# Altium PCB PCB1.PcbDoc
Units mil, origin at the board's own origin, x right, y up, seen from the top; angles counter-clockwise.
Board outline 4400 x 10000 mil, 2 copper layers (Top Layer, Bottom Layer); 340 components, 72 nets, 819 pads, 0 vias.
Unrouted connection lines stored in the file: 1.
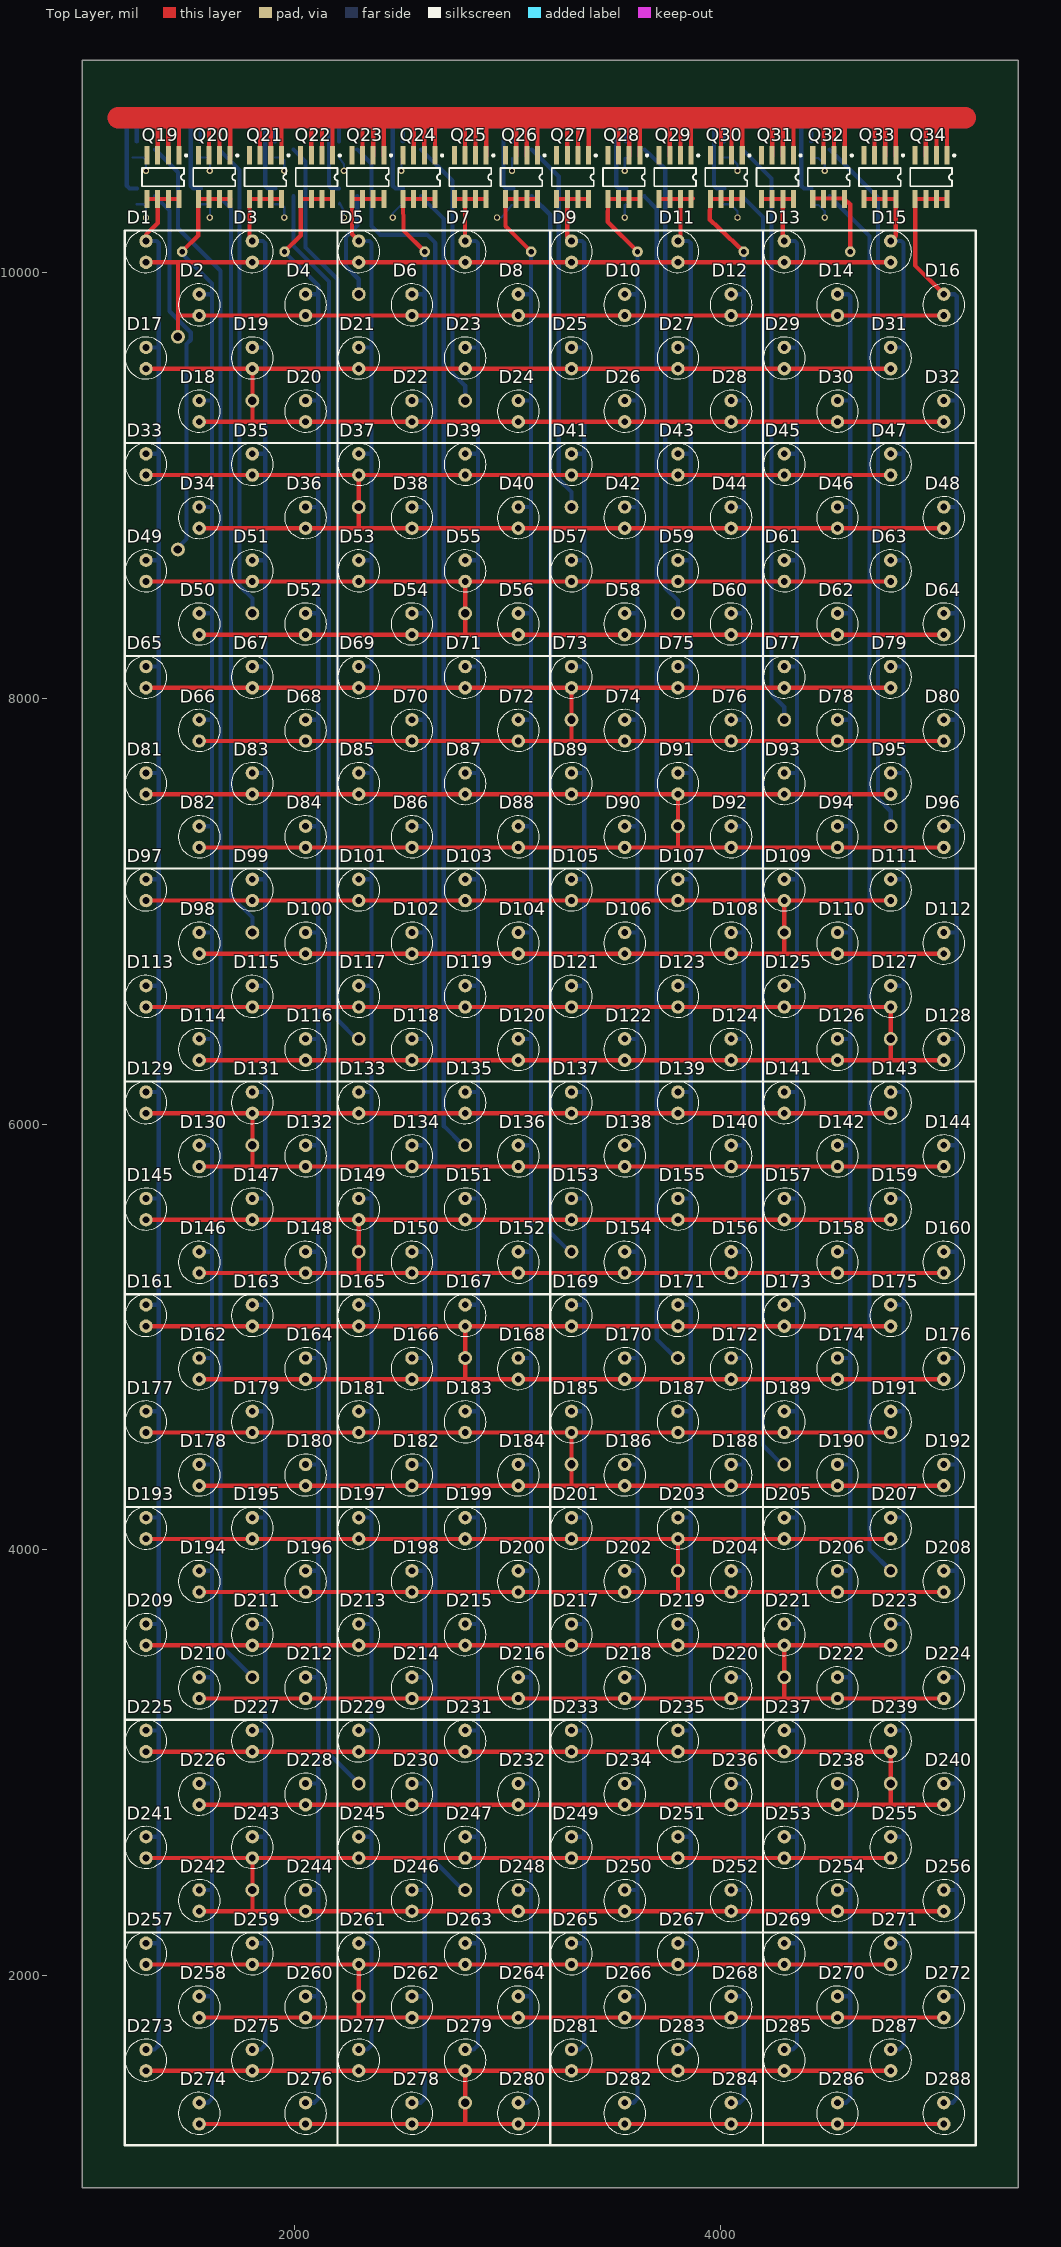
[diagram p0: Top Layer view]
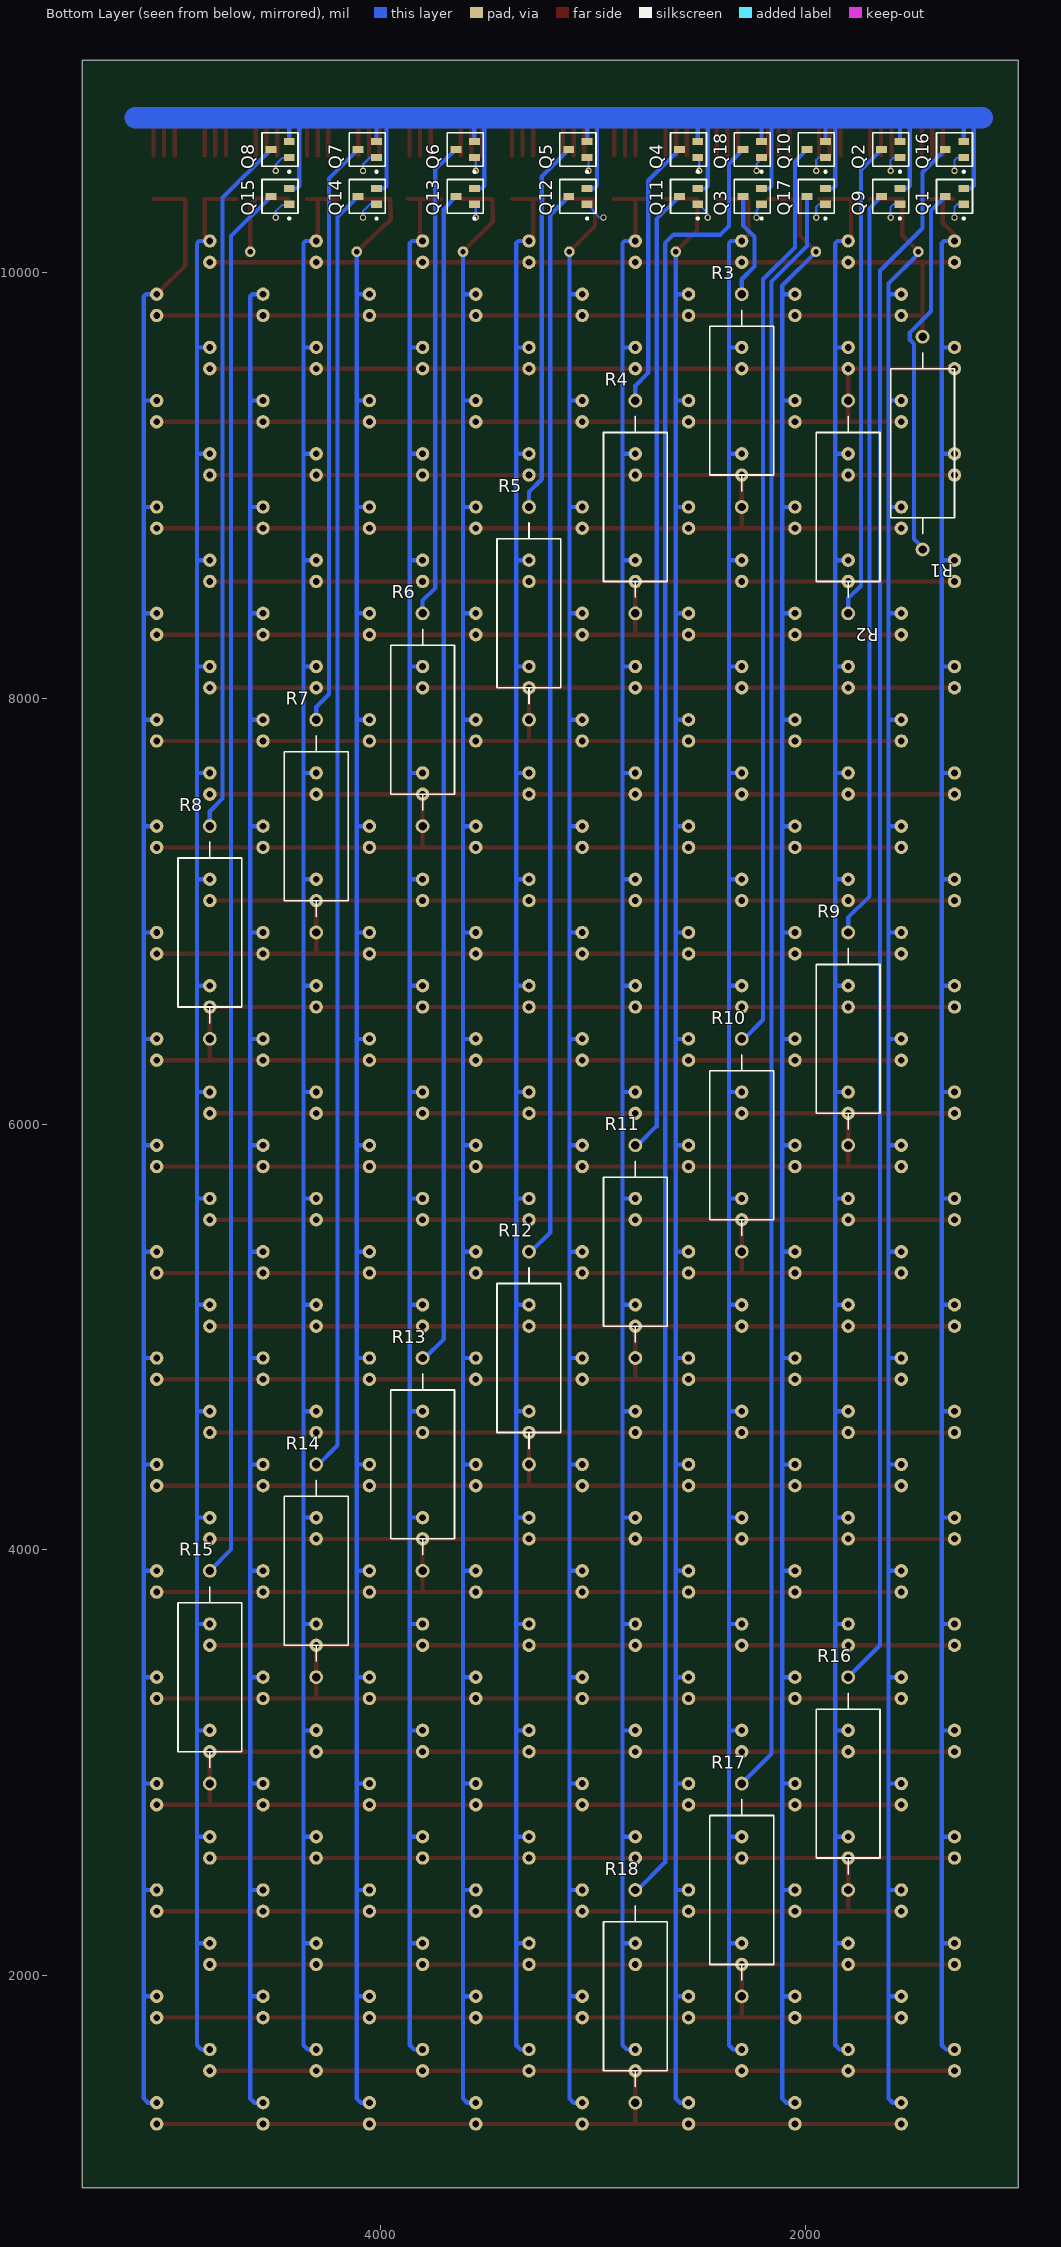
[diagram p1: Bottom Layer view, seen from below]

## Layer stack, top to bottom
Top Layer: signal copper 1.4
Dielectric: dielectric 12.6, FR-4, Dk 4.8
Bottom Layer: signal copper 1.4

## Board outline
1000,1000 5400,1000 5400,11000 1000,11000

## Design rules (kind name [scope] priority, off if disabled: settings)
Clearance [All] p1: gap=10
ComponentClearance [All] p1: gap=10 collisioncheckmode=0
PolygonConnect [All] p1: connectstyle=Relief reliefconductorwidth=10 reliefentries=4 polygonreliefangle="90 Angle"
RoomDefinition DRV1 [InComponentClass('DRV1')] p1: confinementstyle=ConfineIn formatcopy=TRUE outline 2180,200 3510,200 3510,680 2180,680
RoomDefinition MATRIX1 [InComponentClass('MATRIX1')] p2: confinementstyle=ConfineIn formatcopy=TRUE outline 0,0 1510,0 1510,620 0,620
RoutingCorners [All] p1: cornerstyle=Round minsetback=100 maxsetback=100
RoutingLayers [All] p1: top layer=Horizontal bottom layer=Vertical
RoutingTopology [All] p1: topology=Horizontal
RoutingVias RoutingVias_row [InNetClass('row_drive')] p1: holewidth=20 width=30 viastyle="Through Hole" minholewidth=20 minwidth=30 maxholewidth=20 maxwidth=30
RoutingVias RoutingVias_main_power [InNetClass('main_power')] p2: holewidth=50 width=75 viastyle="Through Hole" minholewidth=20 minwidth=30 maxholewidth=50 maxwidth=75
RoutingVias [All] p3: holewidth=18 width=25 viastyle="Through Hole" minholewidth=18 minwidth=25 maxholewidth=18 maxwidth=25
ShortCircuit [All] p1 off: allowed=FALSE
SolderMaskExpansion [All] p1: expansion=4
TestPointUsage [All] p1: valid=0 allowmultiple=FALSE
Testpoint [All] p1: side=15 testpointundercomponent=TRUE minsize=40 maxsize=100 preferedsize=60 minholesize=0 maxholesize=40 preferedholesize=32 testpointgrid=1 style=1023 order=1234567890
UnRoutedNet [All] p1 off:
Width Width_col [InNetClass('col_drive')] p1: maxlimit=20 minlimit=10 preferedwidth=10 toplayer_minwidth=20 toplayer_prefwidth=20 bottomlayer_minwidth=20 bottomlayer_prefwidth=20 minimp=50.000000 maximp=50.000000 favimp=50.000000
Width Width_row [InNetClass('row_drive')] p2: maxlimit=30781.25 minlimit=20 preferedwidth=20 toplayer_maxwidth=20 bottomlayer_maxwidth=20 minimp=50.000000 maximp=50.000000 favimp=50.000000 // Row drivers, rated for 2A
Width Width_main_power [InNetClass('main_power')] p3: maxlimit=100 minlimit=10 preferedwidth=10 toplayer_minwidth=20 toplayer_prefwidth=20 bottomlayer_minwidth=20 bottomlayer_prefwidth=20 minimp=50.000000 maximp=50.000000 favimp=50.000000 // col drivers / main supply, 15A
Width [All] p4: maxlimit=100 minlimit=10 preferedwidth=10 minimp=50.000000 maximp=50.000000 favimp=50.000000
12 further rules are at their usual default settings.

## Classes and differential pairs
net class main_power: +5 GND
net class col_drive: COL<0> COL<1> COL<2> COL<3> COL<4> COL<5> COL<6> COL<7> COL<8> COL<9> COL<10> COL<11> COL<12> COL<13> COL<14> COL<15>
net class row_drive: NetQ1_3 NetQ2_3 NetQ3_3 NetQ4_3 NetQ5_3 NetQ6_3 NetQ7_3 NetQ8_3 NetQ9_3 NetQ10_3 NetQ11_3 NetQ12_3 NetQ13_3 NetQ14_3 NetQ15_3 NetQ16_3 NetQ17_3 NetQ18_3 ROW<0> ROW<1> ROW<2> ROW<3> ROW<4> ROW<5> ROW<6> ROW<7> ROW<8> ROW<9> ROW<10> ROW<11> ROW<12> ROW<13> ROW<14> ROW<15> ROW<16> ROW<17>
component class DRV1: Q1 Q2 Q3 Q4 Q5 Q6 Q7 Q8 Q9 Q10 Q11 Q12 Q13 Q14 Q15 Q16 Q17 Q18 Q19 Q20 Q21 Q22 Q23 Q24 Q25 Q26 Q27 Q28 Q29 Q30 Q31 Q32 Q33 Q34 R1 R2 R3 R4 R5 R6 R7 R8 R9 R10 R11 R12 R13 R14 R15 R16 R17 R18
component class Sheet1: D1 D2 D3 D4 D5 D6 D7 D8 D9 D10 D11 D12 D13 D14 D15 D16 D17 D18 D19 D20 D21 D22 D23 D24 D25 D26 D27 D28 D29 D30 D31 D32 D33 D34 D35 D36 D37 D38 D39 D40 D41 D42 D43 D44 D45 D46 D47 D48 D49 D50 D51 D52 D53 D54 D55 D56 D57 D58 D59 D60 D61 D62 D63 D64 D65 D66 D67 D68 D69 D70 D71 D72 D73 D74 D75 D76 D77 D78 D79 D80 D81 D82 D83 D84 D85 D86 D87 D88 D89 D90 D91 D92 D93 D94 D95 D96 D97 D98 D99 D100 D101 D102 D103 D104 D105 D106 D107 D108 D109 D110 D111 D112 D113 D114 D115 D116 D117 D118 D119 D120 D121 D122 D123 D124 D125 D126 D127 D128 D129 D130 D131 D132 D133 D134 D135 D136 D137 D138 D139 D140 D141 D142 D143 D144 D145 D146 D147 D148 D149 D150 D151 D152 D153 D154 D155 D156 D157 D158 D159 D160 D161 D162 D163 D164 D165 D166 D167 D168 D169 D170 D171 D172 D173 D174 D175 D176 D177 D178 D179 D180 D181 D182 D183 D184 D185 D186 D187 D188 D189 D190 D191 D192 D193 D194 D195 D196 D197 D198 D199 D200 D201 D202 D203 D204 D205 D206 D207 D208 D209 D210 D211 D212 D213 D214 D215 D216 D217 D218 D219 D220 D221 D222 D223 D224 D225 D226 D227 D228 D229 D230 D231 D232 D233 D234 D235 D236 D237 D238 D239 D240 D241 D242 D243 D244 D245 D246 D247 D248 D249 D250 D251 D252 D253 D254 D255 D256 D257 D258 D259 D260 D261 D262 D263 D264 D265 D266 D267 D268 D269 D270 D271 D272 D273 D274 D275 D276 D277 D278 D279 D280 D281 D282 D283 D284 D285 D286 D287 D288

## Components (designator, comment, footprint, x,y, rotation, side; value= is the part's Value field where it differs from the comment)
D1 "" LED-UPRIGHT 1300,10100 r0 top
D2 "" LED-UPRIGHT 1550,9850 r0 top
D3 "" LED-UPRIGHT 1800,10100 r0 top
D4 "" LED-UPRIGHT 2050,9850 r0 top
D5 "" LED-UPRIGHT 2300,10100 r0 top
D6 "" LED-UPRIGHT 2550,9850 r0 top
D7 "" LED-UPRIGHT 2800,10100 r0 top
D8 "" LED-UPRIGHT 3050,9850 r0 top
D9 "" LED-UPRIGHT 3300,10100 r0 top
D10 "" LED-UPRIGHT 3550,9850 r0 top
D11 "" LED-UPRIGHT 3800,10100 r0 top
D12 "" LED-UPRIGHT 4050,9850 r0 top
D13 "" LED-UPRIGHT 4300,10100 r0 top
D14 "" LED-UPRIGHT 4550,9850 r0 top
D15 "" LED-UPRIGHT 4800,10100 r0 top
D16 "" LED-UPRIGHT 5050,9850 r0 top
D17 "" LED-UPRIGHT 1300,9600 r0 top
D18 "" LED-UPRIGHT 1550,9350 r0 top
D19 "" LED-UPRIGHT 1800,9600 r0 top
D20 "" LED-UPRIGHT 2050,9350 r0 top
D21 "" LED-UPRIGHT 2300,9600 r0 top
D22 "" LED-UPRIGHT 2550,9350 r0 top
D23 "" LED-UPRIGHT 2800,9600 r0 top
D24 "" LED-UPRIGHT 3050,9350 r0 top
D25 "" LED-UPRIGHT 3300,9600 r0 top
D26 "" LED-UPRIGHT 3550,9350 r0 top
D27 "" LED-UPRIGHT 3800,9600 r0 top
D28 "" LED-UPRIGHT 4050,9350 r0 top
D29 "" LED-UPRIGHT 4300,9600 r0 top
D30 "" LED-UPRIGHT 4550,9350 r0 top
D31 "" LED-UPRIGHT 4800,9600 r0 top
D32 "" LED-UPRIGHT 5050,9350 r0 top
D33 "" LED-UPRIGHT 1300,9100 r0 top
D34 "" LED-UPRIGHT 1550,8850 r0 top
D35 "" LED-UPRIGHT 1800,9100 r0 top
D36 "" LED-UPRIGHT 2050,8850 r0 top
D37 "" LED-UPRIGHT 2300,9100 r0 top
D38 "" LED-UPRIGHT 2550,8850 r0 top
D39 "" LED-UPRIGHT 2800,9100 r0 top
D40 "" LED-UPRIGHT 3050,8850 r0 top
D41 "" LED-UPRIGHT 3300,9100 r0 top
D42 "" LED-UPRIGHT 3550,8850 r0 top
D43 "" LED-UPRIGHT 3800,9100 r0 top
D44 "" LED-UPRIGHT 4050,8850 r0 top
D45 "" LED-UPRIGHT 4300,9100 r0 top
D46 "" LED-UPRIGHT 4550,8850 r0 top
D47 "" LED-UPRIGHT 4800,9100 r0 top
D48 "" LED-UPRIGHT 5050,8850 r0 top
D49 "" LED-UPRIGHT 1300,8600 r0 top
D50 "" LED-UPRIGHT 1550,8350 r0 top
D51 "" LED-UPRIGHT 1800,8600 r0 top
D52 "" LED-UPRIGHT 2050,8350 r0 top
D53 "" LED-UPRIGHT 2300,8600 r0 top
D54 "" LED-UPRIGHT 2550,8350 r0 top
D55 "" LED-UPRIGHT 2800,8600 r0 top
D56 "" LED-UPRIGHT 3050,8350 r0 top
D57 "" LED-UPRIGHT 3300,8600 r0 top
D58 "" LED-UPRIGHT 3550,8350 r0 top
D59 "" LED-UPRIGHT 3800,8600 r0 top
D60 "" LED-UPRIGHT 4050,8350 r0 top
D61 "" LED-UPRIGHT 4300,8600 r0 top
D62 "" LED-UPRIGHT 4550,8350 r0 top
D63 "" LED-UPRIGHT 4800,8600 r0 top
D64 "" LED-UPRIGHT 5050,8350 r0 top
D65 "" LED-UPRIGHT 1300,8100 r0 top
D66 "" LED-UPRIGHT 1550,7850 r0 top
D67 "" LED-UPRIGHT 1800,8100 r0 top
D68 "" LED-UPRIGHT 2050,7850 r0 top
D69 "" LED-UPRIGHT 2300,8100 r0 top
D70 "" LED-UPRIGHT 2550,7850 r0 top
D71 "" LED-UPRIGHT 2800,8100 r0 top
D72 "" LED-UPRIGHT 3050,7850 r0 top
D73 "" LED-UPRIGHT 3300,8100 r0 top
D74 "" LED-UPRIGHT 3550,7850 r0 top
D75 "" LED-UPRIGHT 3800,8100 r0 top
D76 "" LED-UPRIGHT 4050,7850 r0 top
D77 "" LED-UPRIGHT 4300,8100 r0 top
D78 "" LED-UPRIGHT 4550,7850 r0 top
D79 "" LED-UPRIGHT 4800,8100 r0 top
D80 "" LED-UPRIGHT 5050,7850 r0 top
D81 "" LED-UPRIGHT 1300,7600 r0 top
D82 "" LED-UPRIGHT 1550,7350 r0 top
D83 "" LED-UPRIGHT 1800,7600 r0 top
D84 "" LED-UPRIGHT 2050,7350 r0 top
D85 "" LED-UPRIGHT 2300,7600 r0 top
D86 "" LED-UPRIGHT 2550,7350 r0 top
D87 "" LED-UPRIGHT 2800,7600 r0 top
D88 "" LED-UPRIGHT 3050,7350 r0 top
D89 "" LED-UPRIGHT 3300,7600 r0 top
D90 "" LED-UPRIGHT 3550,7350 r0 top
D91 "" LED-UPRIGHT 3800,7600 r0 top
D92 "" LED-UPRIGHT 4050,7350 r0 top
D93 "" LED-UPRIGHT 4300,7600 r0 top
D94 "" LED-UPRIGHT 4550,7350 r0 top
D95 "" LED-UPRIGHT 4800,7600 r0 top
D96 "" LED-UPRIGHT 5050,7350 r0 top
D97 "" LED-UPRIGHT 1300,7100 r0 top
D98 "" LED-UPRIGHT 1550,6850 r0 top
D99 "" LED-UPRIGHT 1800,7100 r0 top
D100 "" LED-UPRIGHT 2050,6850 r0 top
D101 "" LED-UPRIGHT 2300,7100 r0 top
D102 "" LED-UPRIGHT 2550,6850 r0 top
D103 "" LED-UPRIGHT 2800,7100 r0 top
D104 "" LED-UPRIGHT 3050,6850 r0 top
D105 "" LED-UPRIGHT 3300,7100 r0 top
D106 "" LED-UPRIGHT 3550,6850 r0 top
D107 "" LED-UPRIGHT 3800,7100 r0 top
D108 "" LED-UPRIGHT 4050,6850 r0 top
D109 "" LED-UPRIGHT 4300,7100 r0 top
D110 "" LED-UPRIGHT 4550,6850 r0 top
D111 "" LED-UPRIGHT 4800,7100 r0 top
D112 "" LED-UPRIGHT 5050,6850 r0 top
D113 "" LED-UPRIGHT 1300,6600 r0 top
D114 "" LED-UPRIGHT 1550,6350 r0 top
D115 "" LED-UPRIGHT 1800,6600 r0 top
D116 "" LED-UPRIGHT 2050,6350 r0 top
D117 "" LED-UPRIGHT 2300,6600 r0 top
D118 "" LED-UPRIGHT 2550,6350 r0 top
D119 "" LED-UPRIGHT 2800,6600 r0 top
D120 "" LED-UPRIGHT 3050,6350 r0 top
D121 "" LED-UPRIGHT 3300,6600 r0 top
D122 "" LED-UPRIGHT 3550,6350 r0 top
D123 "" LED-UPRIGHT 3800,6600 r0 top
D124 "" LED-UPRIGHT 4050,6350 r0 top
D125 "" LED-UPRIGHT 4300,6600 r0 top
D126 "" LED-UPRIGHT 4550,6350 r0 top
D127 "" LED-UPRIGHT 4800,6600 r0 top
D128 "" LED-UPRIGHT 5050,6350 r0 top
D129 "" LED-UPRIGHT 1300,6100 r0 top
D130 "" LED-UPRIGHT 1550,5850 r0 top
D131 "" LED-UPRIGHT 1800,6100 r0 top
D132 "" LED-UPRIGHT 2050,5850 r0 top
D133 "" LED-UPRIGHT 2300,6100 r0 top
D134 "" LED-UPRIGHT 2550,5850 r0 top
D135 "" LED-UPRIGHT 2800,6100 r0 top
D136 "" LED-UPRIGHT 3050,5850 r0 top
D137 "" LED-UPRIGHT 3300,6100 r0 top
D138 "" LED-UPRIGHT 3550,5850 r0 top
D139 "" LED-UPRIGHT 3800,6100 r0 top
D140 "" LED-UPRIGHT 4050,5850 r0 top
D141 "" LED-UPRIGHT 4300,6100 r0 top
D142 "" LED-UPRIGHT 4550,5850 r0 top
D143 "" LED-UPRIGHT 4800,6100 r0 top
D144 "" LED-UPRIGHT 5050,5850 r0 top
D145 "" LED-UPRIGHT 1300,5600 r0 top
D146 "" LED-UPRIGHT 1550,5350 r0 top
D147 "" LED-UPRIGHT 1800,5600 r0 top
D148 "" LED-UPRIGHT 2050,5350 r0 top
D149 "" LED-UPRIGHT 2300,5600 r0 top
D150 "" LED-UPRIGHT 2550,5350 r0 top
D151 "" LED-UPRIGHT 2800,5600 r0 top
D152 "" LED-UPRIGHT 3050,5350 r0 top
D153 "" LED-UPRIGHT 3300,5600 r0 top
D154 "" LED-UPRIGHT 3550,5350 r0 top
D155 "" LED-UPRIGHT 3800,5600 r0 top
D156 "" LED-UPRIGHT 4050,5350 r0 top
D157 "" LED-UPRIGHT 4300,5600 r0 top
D158 "" LED-UPRIGHT 4550,5350 r0 top
D159 "" LED-UPRIGHT 4800,5600 r0 top
D160 "" LED-UPRIGHT 5050,5350 r0 top
D161 "" LED-UPRIGHT 1300,5100 r0 top
D162 "" LED-UPRIGHT 1550,4850 r0 top
D163 "" LED-UPRIGHT 1800,5100 r0 top
D164 "" LED-UPRIGHT 2050,4850 r0 top
D165 "" LED-UPRIGHT 2300,5100 r0 top
D166 "" LED-UPRIGHT 2550,4850 r0 top
D167 "" LED-UPRIGHT 2800,5100 r0 top
D168 "" LED-UPRIGHT 3050,4850 r0 top
D169 "" LED-UPRIGHT 3300,5100 r0 top
D170 "" LED-UPRIGHT 3550,4850 r0 top
D171 "" LED-UPRIGHT 3800,5100 r0 top
D172 "" LED-UPRIGHT 4050,4850 r0 top
D173 "" LED-UPRIGHT 4300,5100 r0 top
D174 "" LED-UPRIGHT 4550,4850 r0 top
D175 "" LED-UPRIGHT 4800,5100 r0 top
D176 "" LED-UPRIGHT 5050,4850 r0 top
D177 "" LED-UPRIGHT 1300,4600 r0 top
D178 "" LED-UPRIGHT 1550,4350 r0 top
D179 "" LED-UPRIGHT 1800,4600 r0 top
D180 "" LED-UPRIGHT 2050,4350 r0 top
D181 "" LED-UPRIGHT 2300,4600 r0 top
D182 "" LED-UPRIGHT 2550,4350 r0 top
D183 "" LED-UPRIGHT 2800,4600 r0 top
D184 "" LED-UPRIGHT 3050,4350 r0 top
D185 "" LED-UPRIGHT 3300,4600 r0 top
D186 "" LED-UPRIGHT 3550,4350 r0 top
D187 "" LED-UPRIGHT 3800,4600 r0 top
D188 "" LED-UPRIGHT 4050,4350 r0 top
D189 "" LED-UPRIGHT 4300,4600 r0 top
D190 "" LED-UPRIGHT 4550,4350 r0 top
D191 "" LED-UPRIGHT 4800,4600 r0 top
D192 "" LED-UPRIGHT 5050,4350 r0 top
D193 "" LED-UPRIGHT 1300,4100 r0 top
D194 "" LED-UPRIGHT 1550,3850 r0 top
D195 "" LED-UPRIGHT 1800,4100 r0 top
D196 "" LED-UPRIGHT 2050,3850 r0 top
D197 "" LED-UPRIGHT 2300,4100 r0 top
D198 "" LED-UPRIGHT 2550,3850 r0 top
D199 "" LED-UPRIGHT 2800,4100 r0 top
D200 "" LED-UPRIGHT 3050,3850 r0 top
D201 "" LED-UPRIGHT 3300,4100 r0 top
D202 "" LED-UPRIGHT 3550,3850 r0 top
D203 "" LED-UPRIGHT 3800,4100 r0 top
D204 "" LED-UPRIGHT 4050,3850 r0 top
D205 "" LED-UPRIGHT 4300,4100 r0 top
D206 "" LED-UPRIGHT 4550,3850 r0 top
D207 "" LED-UPRIGHT 4800,4100 r0 top
D208 "" LED-UPRIGHT 5050,3850 r0 top
D209 "" LED-UPRIGHT 1300,3600 r0 top
D210 "" LED-UPRIGHT 1550,3350 r0 top
D211 "" LED-UPRIGHT 1800,3600 r0 top
D212 "" LED-UPRIGHT 2050,3350 r0 top
D213 "" LED-UPRIGHT 2300,3600 r0 top
D214 "" LED-UPRIGHT 2550,3350 r0 top
D215 "" LED-UPRIGHT 2800,3600 r0 top
D216 "" LED-UPRIGHT 3050,3350 r0 top
D217 "" LED-UPRIGHT 3300,3600 r0 top
D218 "" LED-UPRIGHT 3550,3350 r0 top
D219 "" LED-UPRIGHT 3800,3600 r0 top
D220 "" LED-UPRIGHT 4050,3350 r0 top
D221 "" LED-UPRIGHT 4300,3600 r0 top
D222 "" LED-UPRIGHT 4550,3350 r0 top
D223 "" LED-UPRIGHT 4800,3600 r0 top
D224 "" LED-UPRIGHT 5050,3350 r0 top
D225 "" LED-UPRIGHT 1300,3100 r0 top
D226 "" LED-UPRIGHT 1550,2850 r0 top
D227 "" LED-UPRIGHT 1800,3100 r0 top
D228 "" LED-UPRIGHT 2050,2850 r0 top
D229 "" LED-UPRIGHT 2300,3100 r0 top
D230 "" LED-UPRIGHT 2550,2850 r0 top
D231 "" LED-UPRIGHT 2800,3100 r0 top
D232 "" LED-UPRIGHT 3050,2850 r0 top
D233 "" LED-UPRIGHT 3300,3100 r0 top
D234 "" LED-UPRIGHT 3550,2850 r0 top
D235 "" LED-UPRIGHT 3800,3100 r0 top
D236 "" LED-UPRIGHT 4050,2850 r0 top
D237 "" LED-UPRIGHT 4300,3100 r0 top
D238 "" LED-UPRIGHT 4550,2850 r0 top
D239 "" LED-UPRIGHT 4800,3100 r0 top
D240 "" LED-UPRIGHT 5050,2850 r0 top
D241 "" LED-UPRIGHT 1300,2600 r0 top
D242 "" LED-UPRIGHT 1550,2350 r0 top
D243 "" LED-UPRIGHT 1800,2600 r0 top
D244 "" LED-UPRIGHT 2050,2350 r0 top
D245 "" LED-UPRIGHT 2300,2600 r0 top
D246 "" LED-UPRIGHT 2550,2350 r0 top
D247 "" LED-UPRIGHT 2800,2600 r0 top
D248 "" LED-UPRIGHT 3050,2350 r0 top
D249 "" LED-UPRIGHT 3300,2600 r0 top
D250 "" LED-UPRIGHT 3550,2350 r0 top
D251 "" LED-UPRIGHT 3800,2600 r0 top
D252 "" LED-UPRIGHT 4050,2350 r0 top
D253 "" LED-UPRIGHT 4300,2600 r0 top
D254 "" LED-UPRIGHT 4550,2350 r0 top
D255 "" LED-UPRIGHT 4800,2600 r0 top
D256 "" LED-UPRIGHT 5050,2350 r0 top
D257 "" LED-UPRIGHT 1300,2100 r0 top
D258 "" LED-UPRIGHT 1550,1850 r0 top
D259 "" LED-UPRIGHT 1800,2100 r0 top
D260 "" LED-UPRIGHT 2050,1850 r0 top
D261 "" LED-UPRIGHT 2300,2100 r0 top
D262 "" LED-UPRIGHT 2550,1850 r0 top
D263 "" LED-UPRIGHT 2800,2100 r0 top
D264 "" LED-UPRIGHT 3050,1850 r0 top
D265 "" LED-UPRIGHT 3300,2100 r0 top
D266 "" LED-UPRIGHT 3550,1850 r0 top
D267 "" LED-UPRIGHT 3800,2100 r0 top
D268 "" LED-UPRIGHT 4050,1850 r0 top
D269 "" LED-UPRIGHT 4300,2100 r0 top
D270 "" LED-UPRIGHT 4550,1850 r0 top
D271 "" LED-UPRIGHT 4800,2100 r0 top
D272 "" LED-UPRIGHT 5050,1850 r0 top
D273 "" LED-UPRIGHT 1300,1600 r0 top
D274 "" LED-UPRIGHT 1550,1350 r0 top
D275 "" LED-UPRIGHT 1800,1600 r0 top
D276 "" LED-UPRIGHT 2050,1350 r0 top
D277 "" LED-UPRIGHT 2300,1600 r0 top
D278 "" LED-UPRIGHT 2550,1350 r0 top
D279 "" LED-UPRIGHT 2800,1600 r0 top
D280 "" LED-UPRIGHT 3050,1350 r0 top
D281 "" LED-UPRIGHT 3300,1600 r0 top
D282 "" LED-UPRIGHT 3550,1350 r0 top
D283 "" LED-UPRIGHT 3800,1600 r0 top
D284 "" LED-UPRIGHT 4050,1350 r0 top
D285 "" LED-UPRIGHT 4300,1600 r0 top
D286 "" LED-UPRIGHT 4550,1350 r0 top
D287 "" LED-UPRIGHT 4800,1600 r0 top
D288 "" LED-UPRIGHT 5050,1350 r0 top
Q1 "NDS355N" SO-G3 1300,10360 r90 bottom
Q2 "NDS355N" SO-G3 1600,10580 r90 bottom
Q3 "NDS355N" SO-G3 2250,10360 r90 bottom
Q4 "NDS355N" SO-G3 2550,10580 r90 bottom
Q5 "NDS355N" SO-G3 3070,10580 r90 bottom
Q6 "NDS355N" SO-G3 3600,10580 r90 bottom
Q7 "NDS355N" SO-G3 4060,10580 r90 bottom
Q8 "NDS355N" SO-G3 4470,10580 r90 bottom
Q9 "NDS355N" SO-G3 1600,10360 r90 bottom
Q10 "NDS355N" SO-G3 1950,10580 r90 bottom
Q11 "NDS355N" SO-G3 2550,10360 r90 bottom
Q12 "NDS355N" SO-G3 3070,10360 r90 bottom
Q13 "NDS355N" SO-G3 3600,10360 r90 bottom
Q14 "NDS355N" SO-G3 4060,10360 r90 bottom
Q15 "NDS355N" SO-G3 4470,10360 r90 bottom
Q16 "NDS355N" SO-G3 1300,10580 r90 bottom
Q17 "NDS355N" SO-G3 1950,10360 r90 bottom
Q18 "NDS355N" SO-G3 2250,10580 r90 bottom
Q19 "NDS9435A" SO-G8 1380,10450 r180 top
Q20 "NDS9435A" SO-G8 1620.67,10450 r180 top
Q21 "NDS9435A" SO-G8 1861.34,10450 r180 top
Q22 "NDS9435A" SO-G8 2102.01,10450 r180 top
Q23 "NDS9435A" SO-G8 2342.68,10450 r180 top
Q24 "NDS9435A" SO-G8 2583.35,10450 r180 top
Q25 "NDS9435A" SO-G8 2824.02,10450 r180 top
Q26 "NDS9435A" SO-G8 3064.68,10450 r180 top
Q27 "NDS9435A" SO-G8 3305.35,10450 r180 top
Q28 "NDS9435A" SO-G8 3546.02,10450 r180 top
Q29 "NDS9435A" SO-G8 3786.69,10450 r180 top
Q30 "NDS9435A" SO-G8 4027.36,10450 r180 top
Q31 "NDS9435A" SO-G8 4268.03,10450 r180 top
Q32 "NDS9435A" SO-G8 4508.7,10450 r180 top
Q33 "NDS9435A" SO-G8 4749.37,10450 r180 top
Q34 "NDS9435A" SO-G8 4990.04,10450 r180 top
R1 "5 watt" AXIAL-1.0 1450,9200 r270 bottom
R2 "5 watt" AXIAL-1.0 1800,8900 r270 bottom
R3 "5 watt" AXIAL-1.0 2300,9400 r90 bottom
R4 "5 watt" AXIAL-1.0 2800,8900 r90 bottom
R5 "5 watt" AXIAL-1.0 3300,8400 r90 bottom
R6 "5 watt" AXIAL-1.0 3800,7900 r90 bottom
R7 "5 watt" AXIAL-1.0 4300,7400 r90 bottom
R8 "5 watt" AXIAL-1.0 4800,6900 r90 bottom
R9 "5 watt" AXIAL-1.0 1800,6400 r90 bottom
R10 "5 watt" AXIAL-1.0 2300,5900 r90 bottom
R11 "5 watt" AXIAL-1.0 2800,5400 r90 bottom
R12 "5 watt" AXIAL-1.0 3300,4900 r90 bottom
R13 "5 watt" AXIAL-1.0 3800,4400 r90 bottom
R14 "5 watt" AXIAL-1.0 4300,3900 r90 bottom
R15 "5 watt" AXIAL-1.0 4800,3400 r90 bottom
R16 "5 watt" AXIAL-1.0 1800,2900 r90 bottom
R17 "5 watt" AXIAL-1.0 2300,2400 r90 bottom
R18 "5 watt" AXIAL-1.0 2800,1900 r90 bottom

## Footprints (in the part's own frame and the unit in brackets; to place one, negate y for a bottom-side part, rotate by r counter-clockwise, add the part's x,y. Pads: shape width x height; smd on the part's side, far side on the other; paste and mask are expansions set on the pad)
AXIAL-1.0 [mm]
  round 1.65 hole 1: 1(-12.7,0) 2(12.7,0)
  silkscreen extent -10.79,-3.81 10.79,3.81
LED-UPRIGHT [mm]
  round 1.6 hole 0.8: 1(0,1.27) 2(0,-1.27)
  silkscreen extent -2.5,-2.5 2.5,2.5
SO-G3 [mm]
  rect 0.85x1.3 smd: 1(-0.95,-1.1) 2(0.95,-1.1) 3(0,1.1)
  silkscreen extent -2.77,-2.15 2,2.15
SO-G8 [mm]
  rect 0.6x2.2 smd: 1(-1.905,-2.6) 2(-0.635,-2.6) 3(0.635,-2.6) 4(1.905,-2.6) 5(1.905,2.6) 6(0.635,2.6) 7(-0.635,2.6) 8(-1.905,2.6)
  silkscreen extent -2.88,-2.72 2.5,1.1

## Part data
D1 D2 D3 D4 D5 D6 D7 D8 D9 D10 D11 D12 D13 D14 D15 D16 D17 D18 D19 D20 D21 D22 D23 D24 D25 D26 D27 D28 D29 D30 D31 D32 D33 D34 D35 D36 D37 D38 D39 D40 D41 D42 D43 D44 D45 D46 D47 D48 D49 D50 D51 D52 D53 D54 D55 D56 D57 D58 D59 D60 D61 D62 D63 D64 D65 D66 D67 D68 D69 D70 D71 D72 D73 D74 D75 D76 D77 D78 D79 D80 D81 D82 D83 D84 D85 D86 D87 D88 D89 D90 D91 D92 D93 D94 D95 D96 D97 D98 D99 D100 D101 D102 D103 D104 D105 D106 D107 D108 D109 D110 D111 D112 D113 D114 D115 D116 D117 D118 D119 D120 D121 D122 D123 D124 D125 D126 D127 D128 D129 D130 D131 D132 D133 D134 D135 D136 D137 D138 D139 D140 D141 D142 D143 D144 D145 D146 D147 D148 D149 D150 D151 D152 D153 D154 D155 D156 D157 D158 D159 D160 D161 D162 D163 D164 D165 D166 D167 D168 D169 D170 D171 D172 D173 D174 D175 D176 D177 D178 D179 D180 D181 D182 D183 D184 D185 D186 D187 D188 D189 D190 D191 D192 D193 D194 D195 D196 D197 D198 D199 D200 D201 D202 D203 D204 D205 D206 D207 D208 D209 D210 D211 D212 D213 D214 D215 D216 D217 D218 D219 D220 D221 D222 D223 D224 D225 D226 D227 D228 D229 D230 D231 D232 D233 D234 D235 D236 D237 D238 D239 D240 D241 D242 D243 D244 D245 D246 D247 D248 D249 D250 D251 D252 D253 D254 D255 D256 D257 D258 D259 D260 D261 D262 D263 D264 D265 D266 D267 D268 D269 D270 D271 D272 D273 D274 D275 D276 D277 D278 D279 D280 D281 D282 D283 D284 D285 D286 D287 D288: library part LED0, "Typical INFRARED GaAs LED"
Q1 Q2 Q3 Q4 Q5 Q6 Q7 Q8 Q9 Q10 Q11 Q12 Q13 Q14 Q15 Q16 Q17 Q18: library part ZXMN2A03E6, "20V N-Channel Enhancement Mode MOSFET"
Q19 Q20 Q21 Q22 Q23 Q24 Q25 Q26 Q27 Q28 Q29 Q30 Q31 Q32 Q33 Q34: "30V P-Channel PowerTrench MOSFET"
R1 R2 R3 R4 R5 R6 R7 R8 R9 R10 R11 R12 R13 R14 R15 R16 R17 R18: library part Res1, "Resistor"

## Free pads (board coordinates)
  round 30 hole 18: 0(1300,10260) 0(1300,10480) 0(1600,10260) 0(1600,10480) 0(1950,10260) 0(1950,10480) 0(2230,10260) 0(2230,10480) 0(2460,10260) 0(2500,10480) 0(2950,10260) 0(3020,10480) 0(3550,10260) 0(3550,10480) 0(4080,10260) 0(4080,10480) 0(4490,10260) 0(4490,10480)
  round 50 hole 25: 0(1470,10100) 0(1951.34,10100) 0(2610,10100) 0(3110,10100) 0(3610,10100) 0(4110,10100) 0(4610,10100)

## Nets (pads, with @x,y where several pads share a name; then routed paths per layer and width w, separated by ;. In a path a pad name is that pad's centre, name@x,y a point inside that pad or via, vN(x,y) a via of type N, cw(c..) or ccw(c..) an arc to the next point about the centre after c; other vN are vias at no path point)
+5: Q19.1 Q19.2 Q19.3 Q20.1 Q20.2 Q20.3 Q21.1 Q21.2 Q21.3 Q22.1 Q22.2 Q22.3 Q23.1 Q23.2 Q23.3 Q24.1 Q24.2 Q24.3 Q25.1 Q25.2 Q25.3 Q26.1 Q26.2 Q26.3 Q27.1 Q27.2 Q27.3 Q28.1 Q28.2 Q28.3 Q29.1 Q29.2 Q29.3 Q30.1 Q30.2 Q30.3 Q31.1 Q31.2 Q31.3 Q32.1 Q32.2 Q32.3 Q33.1 Q33.2 Q33.3 Q34.1 Q34.2 Q34.3 | length 12554.6
  Top Layer w20: Q19.3 1355,10731 ; Q19.2 1405,10731 ; Q19.1 1455,10731 ; Q20.3 1595.67,10731 ; Q20.2 1645.67,10731 ; Q20.1 1695.67,10731 ; Q21.3 1836.34,10731 ; Q21.2 1886.34,10731 ; Q21.1 1936.34,10731 ; Q22.3 2077.01,10731 ; Q22.2 2127.01,10731 ; Q22.1 2177.01,10731 ; Q23.3 2317.68,10731 ; Q23.2 2367.68,10731 ; Q23.1 2417.68,10731 ; Q24.3 2558.35,10731 ; Q24.2 2608.35,10731 ; Q24.1 2658.35,10731 ; Q25.3 2799.02,10731 ; Q25.2 2849.02,10731 ; Q25.1 2899.02,10731 ; Q26.3 3039.68,10731 ; Q26.2 3089.68,10731 ; Q26.1 3139.68,10731 ; Q27.3 3280.35,10731 ; Q27.2 3330.35,10731 ; Q27.1 3380.35,10731 ; Q28.3 3521.02,10731 ; Q28.2 3571.02,10731 ; Q28.1 3621.02,10731 ; Q29.3 3761.69,10731 ; Q29.2 3811.69,10731 ; Q29.1 3861.69,10731 ; Q30.3 4002.36,10731 ; Q30.2 4052.36,10731 ; Q30.1 4102.36,10731 ; Q31.3 4243.03,10731 ; Q31.2 4293.03,10731 ; Q31.1 4343.03,10731 ; Q32.3 4483.7,10731 ; Q32.2 4533.7,10731 ; Q32.1 4583.7,10731 ; Q33.3 4724.37,10731 ; Q33.2 4774.37,10731 ; Q33.1 4824.37,10731 ; Q34.3 4965.04,10731 ; Q34.2 5015.04,10731 ; Q34.1 5065.04,10731
  Top Layer w100: 1170,10730 5150,10730
COL<0>: D1.1 D17.1 D33.1 D49.1 D65.1 D81.1 D97.1 D113.1 D129.1 D145.1 D161.1 D177.1 D193.1 D209.1 D225.1 D241.1 D257.1 D273.1 Q19.5 Q19.6 Q19.7 Q19.8 | length 9982.8
  Top Layer w20: D1.1 1300,10180 1355,10235 Q19.6 Q19.5 Q19.8
  Bottom Layer w20: D273.1 1340,1650 1360,1670 1360,10140 1350,10150 D1.1 ; D257.1 1360,2150 ; D241.1 1360,2650 ; D225.1 1360,3150 ; D209.1 1360,3650 ; D193.1 1360,4150 ; D177.1 1360,4650 ; D161.1 1360,5150 ; D145.1 1360,5650 ; D129.1 1360,6150 ; D113.1 1360,6650 ; D97.1 1360,7150 ; D81.1 1360,7650 ; D65.1 1360,8150 ; D49.1 1360,8650 ; D33.1 1360,9150 ; D17.1 1360,9650
COL<1>: D2.1 D18.1 D34.1 D50.1 D66.1 D82.1 D98.1 D114.1 D130.1 D146.1 D162.1 D178.1 D194.1 D210.1 D226.1 D242.1 D258.1 D274.1 pad.0@1470,10100 Q20.5 Q20.6 Q20.7 Q20.8 | length 10259.4
  Top Layer w20: pad.0@1470,10100 1545.67,10175.67 Q20.5 Q20.8
  Bottom Layer w20: pad.0@1470,10100 1470,10090 1610,9950 1610,1420 1590,1400 D274.1 ; D258.1 1610,1900 ; D242.1 1610,2400 ; D226.1 1610,2900 ; D210.1 1610,3400 ; D194.1 1610,3900 ; D178.1 1610,4400 ; D162.1 1610,4900 ; D146.1 1610,5400 ; D130.1 1610,5900 ; D114.1 1610,6400 ; D98.1 1610,6900 ; D82.1 1610,7400 ; D66.1 1610,7900 ; D50.1 1610,8400 ; D34.1 1610,8900 ; D18.1 1610,9400 ; D2.1 1600,9900 1610,9890
COL<2>: D3.1 D19.1 D35.1 D51.1 D67.1 D83.1 D99.1 D115.1 D131.1 D147.1 D163.1 D179.1 D195.1 D211.1 D227.1 D243.1 D259.1 D275.1 Q21.5 Q21.6 Q21.7 Q21.8 | length 9915.7
  Top Layer w20: D3.1 1786.34,10163.66 Q21.5 Q21.8
  Bottom Layer w20: D275.1 1840,1650 1860,1670 1860,10140 1850,10150 D3.1 ; D259.1 1860,2150 ; D243.1 1860,2650 ; D227.1 1860,3150 ; D211.1 1860,3650 ; D195.1 1860,4150 ; D179.1 1860,4650 ; D163.1 1860,5150 ; D147.1 1860,5650 ; D131.1 1860,6150 ; D115.1 1860,6650 ; D99.1 1860,7150 ; D83.1 1860,7650 ; D67.1 1860,8150 ; D51.1 1860,8650 ; D35.1 1860,9150 ; D19.1 1860,9650
COL<3>: D4.1 D20.1 D36.1 D52.1 D68.1 D84.1 D100.1 D116.1 D132.1 D148.1 D164.1 D180.1 D196.1 D212.1 D228.1 D244.1 D260.1 D276.1 pad.0@1951.34,10100 Q22.5 Q22.6 Q22.7 Q22.8 | length 10267.1
  Top Layer w20: pad.0@1951.34,10100 2027.01,10175.67 Q22.5 Q22.8
  Bottom Layer w20: pad.0@1951.34,10100 1951.34,10098.66 2110,9940 2110,1420 2090,1400 D276.1 ; D260.1 2110,1900 ; D244.1 2110,2400 ; D228.1 2110,2900 ; D212.1 2110,3400 ; D196.1 2110,3900 ; D180.1 2110,4400 ; D164.1 2110,4900 ; D148.1 2110,5400 ; D132.1 2110,5900 ; D116.1 2110,6400 ; D100.1 2110,6900 ; D84.1 2110,7400 ; D68.1 2110,7900 ; D52.1 2110,8400 ; D36.1 2110,8900 ; D20.1 2110,9400 ; D4.1 2100,9900 2110,9890
COL<4>: D5.1 D21.1 D37.1 D53.1 D69.1 D85.1 D101.1 D117.1 D133.1 D149.1 D165.1 D181.1 D197.1 D213.1 D229.1 D245.1 D261.1 D277.1 Q23.5 Q23.6 Q23.7 Q23.8 | length 9923.5
  Top Layer w20: D5.1 2267.68,10182.32 Q23.5 Q23.8
  Bottom Layer w20: D277.1 2340,1650 2360,1670 2360,10140 2350,10150 D5.1 ; D261.1 2360,2150 ; D245.1 2360,2650 ; D229.1 2360,3150 ; D213.1 2360,3650 ; D197.1 2360,4150 ; D181.1 2360,4650 ; D165.1 2360,5150 ; D149.1 2360,5650 ; D133.1 2360,6150 ; D117.1 2360,6650 ; D101.1 2360,7150 ; D85.1 2360,7650 ; D69.1 2360,8150 ; D53.1 2360,8650 ; D37.1 2360,9150 ; D21.1 2360,9650
COL<5>: D6.1 D22.1 D38.1 D54.1 D70.1 D86.1 D102.1 D118.1 D134.1 D150.1 D166.1 D182.1 D198.1 D214.1 D230.1 D246.1 D262.1 D278.1 pad.0@2610,10100 Q24.5 Q24.6 Q24.7 Q24.8 | length 10211.5
  Top Layer w20: pad.0@2610,10100 2510,10200 Q24.5 Q24.8
  Bottom Layer w20: D278.1 2590,1400 2610,1420 2610,9940 pad.0@2610,10100 ; D262.1 2610,1900 ; D246.1 2610,2400 ; D230.1 2610,2900 ; D214.1 2610,3400 ; D198.1 2610,3900 ; D182.1 2610,4400 ; D166.1 2610,4900 ; D150.1 2610,5400 ; D134.1 2610,5900 ; D118.1 2610,6400 ; D102.1 2610,6900 ; D86.1 2610,7400 ; D70.1 2610,7900 ; D54.1 2610,8400 ; D38.1 2610,8900 ; D22.1 2610,9400 ; D6.1 2600,9900 2610,9890
COL<6>: D7.1 D23.1 D39.1 D55.1 D71.1 D87.1 D103.1 D119.1 D135.1 D151.1 D167.1 D183.1 D199.1 D215.1 D231.1 D247.1 D263.1 D279.1 Q25.5 Q25.6 Q25.7 Q25.8 | length 9910.5
  Top Layer w20: Q25.5 Q25.8 ; Q25.6 2799.02,10150.98 D7.1
  Bottom Layer w20: D279.1 2840,1650 2860,1670 2860,10140 2850,10150 D7.1 ; D263.1 2860,2150 ; D247.1 2860,2650 ; D231.1 2860,3150 ; D215.1 2860,3650 ; D199.1 2860,4150 ; D183.1 2860,4650 ; D167.1 2860,5150 ; D151.1 2860,5650 ; D135.1 2860,6150 ; D119.1 2860,6650 ; D103.1 2860,7150 ; D87.1 2860,7650 ; D71.1 2860,8150 ; D55.1 2860,8650 ; D39.1 2860,9150 ; D23.1 2860,9650
COL<7>: D8.1 D24.1 D40.1 D56.1 D72.1 D88.1 D104.1 D120.1 D136.1 D152.1 D168.1 D184.1 D200.1 D216.1 D232.1 D248.1 D264.1 D280.1 pad.0@3110,10100 Q26.5 Q26.6 Q26.7 Q26.8 | length 10215.6
  Top Layer w20: pad.0@3110,10100 2990,10220 Q26.5 Q26.8
  Bottom Layer w20: D280.1 3090,1400 3110,1420 3110,9890 3110,9900 ; D264.1 3110,1900 ; D248.1 3110,2400 ; D232.1 3110,2900 ; D216.1 3110,3400 ; D200.1 3110,3900 ; D184.1 3110,4400 ; D168.1 3110,4900 ; D152.1 3110,5400 ; D136.1 3110,5900 ; D120.1 3110,6400 ; D104.1 3110,6900 ; D88.1 3110,7400 ; D72.1 3110,7900 ; D56.1 3110,8400 ; D40.1 3110,8900 ; D24.1 3110,9400 ; D8.1 3110,9900 ; pad.0@3110,10100 3110,9900
COL<8>: D9.1 D25.1 D41.1 D57.1 D73.1 D89.1 D105.1 D121.1 D137.1 D153.1 D169.1 D185.1 D201.1 D217.1 D233.1 D249.1 D265.1 D281.1 Q27.5 Q27.6 Q27.7 Q27.8 | length 9918.2
  Top Layer w20: Q27.5 Q27.8 ; Q27.6 3280.35,10169.65 D9.1
  Bottom Layer w20: D281.1 3340,1650 3360,1670 3360,10140 3350,10150 D9.1 ; D265.1 3360,2150 ; D249.1 3360,2650 ; D233.1 3360,3150 ; D217.1 3360,3650 ; D201.1 3360,4150 ; D185.1 3360,4650 ; D169.1 3360,5150 ; D153.1 3360,5650 ; D137.1 3360,6150 ; D121.1 3360,6650 ; D105.1 3360,7150 ; D89.1 3360,7650 ; D73.1 3360,8150 ; D57.1 3360,8650 ; D41.1 3360,9150 ; D25.1 3360,9650
COL<9>: D10.1 D26.1 D42.1 D58.1 D74.1 D90.1 D106.1 D122.1 D138.1 D154.1 D170.1 D186.1 D202.1 D218.1 D234.1 D250.1 D266.1 D282.1 pad.0@3610,10100 Q28.5 Q28.6 Q28.7 Q28.8 | length 10228.1
  Top Layer w20: pad.0@3610,10100 3470,10240 Q28.5 Q28.8
  Bottom Layer w20: D282.1 3590,1400 3610,1420 pad.0@3610,10100 ; D266.1 3610,1900 ; D250.1 3610,2400 ; D234.1 3610,2900 ; D218.1 3610,3400 ; D202.1 3610,3900 ; D186.1 3610,4400 ; D170.1 3610,4900 ; D154.1 3610,5400 ; D138.1 3610,5900 ; D122.1 3610,6400 ; D106.1 3610,6900 ; D90.1 3610,7400 ; D74.1 3610,7900 ; D58.1 3610,8400 ; D42.1 3610,8900 ; D26.1 3610,9400 ; D10.1 3600,9900 3610,9890
COL<10>: D11.1 D27.1 D43.1 D59.1 D75.1 D91.1 D107.1 D123.1 D139.1 D155.1 D171.1 D187.1 D203.1 D219.1 D235.1 D251.1 D267.1 D283.1 Q29.5 Q29.6 Q29.7 Q29.8 | length 9924.2
  Top Layer w20: Q29.5 3867.64,10347.64 Q29.8@3870,10350 ; D11.1 3811.69,10161.69 Q29.7
  Bottom Layer w20: D283.1 3840,1650 3860,1670 3860,10140 3850,10150 D11.1 ; D267.1 3860,2150 ; D251.1 3860,2650 ; D235.1 3860,3150 ; D219.1 3860,3650 ; D203.1 3860,4150 ; D187.1 3860,4650 ; D171.1 3860,5150 ; D155.1 3860,5650 ; D139.1 3860,6150 ; D123.1 3860,6650 ; D107.1 3860,7150 ; D91.1 3860,7650 ; D75.1 3860,8150 ; D59.1 3860,8650 ; D43.1 3860,9150 ; D27.1 3860,9650
COL<11>: D12.1 D28.1 D44.1 D60.1 D76.1 D92.1 D108.1 D124.1 D140.1 D156.1 D172.1 D188.1 D204.1 D220.1 D236.1 D252.1 D268.1 D284.1 pad.0@4110,10100 Q30.5 Q30.6 Q30.7 Q30.8 | length 10239.4
  Top Layer w20: Q30.8 Q30.5 3950,10250 pad.0@4110,10100
  Bottom Layer w20: D284.1 4090,1400 4110,1420 pad.0@4110,10100 ; D268.1 4110,1900 ; D252.1 4110,2400 ; D236.1 4110,2900 ; D220.1 4110,3400 ; D204.1 4110,3900 ; D188.1 4110,4400 ; D172.1 4110,4900 ; D156.1 4110,5400 ; D140.1 4110,5900 ; D124.1 4110,6400 ; D108.1 4110,6900 ; D92.1 4110,7400 ; D76.1 4110,7900 ; D60.1 4110,8400 ; D44.1 4110,8900 ; D28.1 4110,9400 ; D12.1 4100,9900 4110,9890
COL<12>: D13.1 D29.1 D45.1 D61.1 D77.1 D93.1 D109.1 D125.1 D141.1 D157.1 D173.1 D189.1 D205.1 D221.1 D237.1 D253.1 D269.1 D285.1 Q31.5 Q31.6 Q31.7 Q31.8 | length 9913
  Top Layer w20: Q31.5 Q31.8 ; Q31.7 4293.03,10156.97 D13.1
  Bottom Layer w20: D285.1 4340,1650 4360,1670 4360,10140 4350,10150 D13.1 ; D269.1 4360,2150 ; D253.1 4360,2650 ; D237.1 4360,3150 ; D221.1 4360,3650 ; D205.1 4360,4150 ; D189.1 4360,4650 ; D173.1 4360,5150 ; D157.1 4360,5650 ; D141.1 4360,6150 ; D125.1 4360,6650 ; D109.1 4360,7150 ; D93.1 4360,7650 ; D77.1 4360,8150 ; D61.1 4360,8650 ; D45.1 4360,9150 ; D29.1 4360,9650
COL<13>: D14.1 D30.1 D46.1 D62.1 D78.1 D94.1 D110.1 D126.1 D142.1 D158.1 D174.1 D190.1 D206.1 D222.1 D238.1 D254.1 D270.1 D286.1 pad.0@4610,10100 Q32.5 Q32.6 Q32.7 Q32.8 | length 9975.6
  Top Layer w20: Q32.5@4430,10350 4581.34,10350 4610,10321.34 pad.0@4610,10100
  Bottom Layer w20: D286.1 4590,1400 4610,1420 4610,9890 4600,9900 D14.1 ; D270.1 4610,1900 ; D254.1 4610,2400 ; D238.1 4610,2900 ; D222.1 4610,3400 ; D206.1 4610,3900 ; D190.1 4610,4400 ; D174.1 4610,4900 ; D158.1 4610,5400 ; D142.1 4610,5900 ; D126.1 4610,6400 ; D110.1 4610,6900 ; D94.1 4610,7400 ; D78.1 4610,7900 ; D62.1 4610,8400 ; D46.1 4610,8900 ; D30.1 4610,9400
COL<14>: D15.1 D31.1 D47.1 D63.1 D79.1 D95.1 D111.1 D127.1 D143.1 D159.1 D175.1 D191.1 D207.1 D223.1 D239.1 D255.1 D271.1 D287.1 Q33.5 Q33.6 Q33.7 Q33.8 | length 9920.2
  Top Layer w20: Q33.5 Q33.8 4824.37,10174.37 D15.1
  Bottom Layer w20: D287.1 4840,1650 4860,1670 4860,10140 4850,10150 D15.1 ; D271.1 4860,2150 ; D255.1 4860,2650 ; D239.1 4860,3150 ; D223.1 4860,3650 ; D207.1 4860,4150 ; D191.1 4860,4650 ; D175.1 4860,5150 ; D159.1 4860,5650 ; D143.1 4860,6150 ; D127.1 4860,6650 ; D111.1 4860,7150 ; D95.1 4860,7650 ; D79.1 4860,8150 ; D63.1 4860,8650 ; D47.1 4860,9150 ; D31.1 4860,9650
COL<15>: D16.1 D32.1 D48.1 D64.1 D80.1 D96.1 D112.1 D128.1 D144.1 D160.1 D176.1 D192.1 D208.1 D224.1 D240.1 D256.1 D272.1 D288.1 Q34.5 Q34.6 Q34.7 Q34.8 | length 10216
  Top Layer w20: D16.1 4915.04,10034.96 Q34.5 Q34.8
  Bottom Layer w20: D288.1 5090,1400 5110,1420 5110,9890 5100,9900 D16.1 ; D272.1 5110,1900 ; D256.1 5110,2400 ; D240.1 5110,2900 ; D224.1 5110,3400 ; D208.1 5110,3900 ; D192.1 5110,4400 ; D176.1 5110,4900 ; D160.1 5110,5400 ; D144.1 5110,5900 ; D128.1 5110,6400 ; D112.1 5110,6900 ; D96.1 5110,7400 ; D80.1 5110,7900 ; D64.1 5110,8400 ; D48.1 5110,8900 ; D32.1 5110,9400
GND: Q1.2 Q2.2 Q3.2 Q4.2 Q5.2 Q6.2 Q7.2 Q8.2 Q9.2 Q10.2 Q11.2 Q12.2 Q13.2 Q14.2 Q15.2 Q16.2 Q17.2 Q18.2 | length 8411.9
  Bottom Layer w20: 1210,10730 1210,10410 1222.6,10397.4 Q1.2@1257.4,10397.4 ; Q16.2 1256.69,10736.69 1260,10740 ; 1510,10730 1510,10410 1522.6,10397.4 Q9.2@1557.4,10397.4 ; Q2.2 1556.69,10736.69 ; 1860,10730 1860,10410 1872.6,10397.4 Q17.2@1907.4,10397.4 ; Q10.2 1906.69,10736.69 ; 2160,10730 2160,10410 2172.6,10397.4 Q3.2@2207.4,10397.4 ; Q18.2 2206.69,10736.69 ; 2460,10730 2460,10410 2472.6,10397.4 Q11.2@2507.4,10397.4 ; Q4.2 2506.69,10736.69 ; 2980,10730 2980,10410 2992.6,10397.4 Q12.2@3027.4,10397.4 ; Q5.2 3026.69,10736.69 ; 3510,10730 3510,10410 3522.6,10397.4 Q13.2@3557.4,10397.4 ; Q6.2 3556.69,10736.69 ; 3970,10730 3970,10410 3982.6,10397.4 Q14.2@4017.4,10397.4 ; Q7.2 4016.69,10736.69 ; 4380,10730 4380,10410 4392.6,10397.4 Q15.2@4427.4,10397.4 ; Q8.2 4426.69,10736.69
  Bottom Layer w100: 1170,10730 5150,10730
NetQ1_1: pad.0@1300,10260 Q1.1 | length 98.5
  Bottom Layer w10: Q1.1 1287.4,10322.6 1300,10310 pad.0@1300,10260
NetQ1_3: Q1.3 R1.2 | length 1753.9
  Bottom Layer w20: Q1.3 1410,10293.31 1410,9820 1510,9720 1510,9686.03 1490,9666.03 1490,8750 1450,8710 R1.2
NetQ2_1: pad.0@1600,10480 Q2.1 | length 98.5
  Bottom Layer w10: Q2.1 1587.4,10542.6 1600,10530 pad.0@1600,10480
NetQ2_3: Q2.3 R2.2 | length 2244.9
  Bottom Layer w20: Q2.3 1740,10483.31 1740,8530 1800,8470 R2.2
NetQ3_1: pad.0@2230,10260 Q3.1 | length 82.8
  Bottom Layer w10: Q3.1 2210,10330 2230,10290 pad.0@2230,10260
NetQ3_3: Q3.3 R3.2 | length 506.9
  Bottom Layer w20: Q3.3 2293.31,10223.31 2240,10170 2240,10030 2300,9970 R3.2
NetQ4_1: pad.0@2500,10480 Q4.1 | length 60
  Bottom Layer w10: pad.0@2500,10480 Q4.1@2500,10540
NetQ4_3: Q4.3 R4.2 | length 1265.6
  Bottom Layer w20: Q4.3 2740,10433.31 2740,9530 2800,9470 R4.2
NetQ5_1: pad.0@3020,10480 Q5.1 | length 60
  Bottom Layer w10: pad.0@3020,10480 Q5.1@3020,10540
NetQ5_3: Q5.3 R5.2 | length 1757.3
  Bottom Layer w20: Q5.3 3240,10453.31 3240,9030 3300,8970 R5.2
NetQ6_1: pad.0@3550,10480 Q6.1 | length 74.2
  Bottom Layer w10: pad.0@3550,10480 3550,10540 3560,10540 Q6.1
NetQ6_3: Q6.3 R6.2 | length 2246.9
  Bottom Layer w20: Q6.3 3740,10490 3740,8520 3800,8460 R6.2
NetQ7_1: pad.0@4080,10480 Q7.1 | length 106.8
  Bottom Layer w10: Q7.1 4047.4,10542.6 4080,10510 pad.0@4080,10480
NetQ7_3: Q7.3 R7.2 | length 2761.5
  Bottom Layer w20: Q7.3 4240,10443.31 4240,8020 4300,7960 R7.2
NetQ8_1: pad.0@4490,10480 Q8.1 | length 106.8
  Bottom Layer w10: Q8.1 4429.29,10540 4460,10540 4490,10510 pad.0@4490,10480
NetQ8_3: Q8.3 R8.2 | length 3298.8
  Bottom Layer w20: Q8.3 4740,10353.31 4740,7530 4800,7470 R8.2
NetQ9_1: pad.0@1600,10260 Q9.1 | length 98.5
  Bottom Layer w10: Q9.1 1587.4,10322.6 1600,10310 pad.0@1600,10260
NetQ9_3: Q9.3 R9.2 | length 3524.9
  Bottom Layer w20: Q9.3 1700,10303.31 1700,7070 1800,6970 R9.2
NetQ10_1: pad.0@1950,10480 Q10.1 | length 98.5
  Bottom Layer w10: Q10.1 1937.4,10542.6 1950,10530 pad.0@1950,10480
NetQ10_3: Q10.3 R10.2 | length 4312.9
  Bottom Layer w20: Q10.3 2050,10523.31 2050,10120 2200,9970 2200,6490 2290,6400 R10.2
NetQ11_1: pad.0@2460,10260 Q11.1 | length 83.7
  Bottom Layer w10: pad.0@2460,10260 2460,10280 2500,10320 Q11.1
NetQ11_3: Q11.3 R11.2 | length 4551.5
  Bottom Layer w20: Q11.3 2700,10253.31 2700,5990 2790,5900 R11.2
NetQ12_1: pad.0@2950,10260 Q12.1 | length 98.1
  Bottom Layer w10: pad.0@2950,10260 2970,10260 Q12.1@3020,10320
NetQ12_3: Q12.3 R12.2 | length 5043.2
  Bottom Layer w20: Q12.3 3200,10273.31 3200,5490 3290,5400 R12.2
NetQ13_1: pad.0@3550,10260 Q13.1 | length 67.2
  Bottom Layer w10: pad.0@3550,10260 3550,10320 Q13.1
NetQ13_3: Q13.3 R13.2 | length 5529.8
  Bottom Layer w20: Q13.3 3700,10300 3700,4990 3790,4900 R13.2
NetQ14_1: pad.0@4080,10260 Q14.1 | length 106.8
  Bottom Layer w10: Q14.1 4047.4,10322.6 4080,10290 pad.0@4080,10260
NetQ14_3: Q14.3 R14.2 | length 6047.3
  Bottom Layer w20: Q14.3 4200,10263.31 4200,4490 4290,4400 R14.2
NetQ15_1: pad.0@4490,10260 Q15.1 | length 106.8
  Bottom Layer w10: Q15.1 4429.29,10320 4460,10320 4490,10290 pad.0@4490,10260
NetQ15_3: Q15.3 R15.2 | length 6578.8
  Bottom Layer w20: Q15.3 4700,10173.31 4700,4000 R15.2
NetQ16_1: pad.0@1300,10480 Q16.1 | length 117.8
  Bottom Layer w10: Q16.1@1237.4,10542.6 1287.4,10542.6 1300,10530 pad.0@1300,10480
NetQ16_3: Q16.3 R16.2 | length 7369.2
  Bottom Layer w20: Q16.3 1450,10473.31 1450,10210 1650,10010 1650,3550 R16.2
NetQ17_1: pad.0@1950,10260 Q17.1 | length 98.5
  Bottom Layer w10: Q17.1 1937.4,10322.6 1950,10310 pad.0@1950,10260
NetQ17_3: Q17.3 R17.2 | length 7587
  Bottom Layer w20: Q17.3 1993.31,10126.69 2160,9960 2160,3040 R17.2
NetQ18_1: pad.0@2230,10480 Q18.1 | length 70.1
  Bottom Layer w10: Q18.1 2230,10510 pad.0@2230,10480
NetQ18_3: Q18.3 R18.2 | length 8524.6
  Bottom Layer w20: Q18.3 2360,10513.31 2360,10220 2400,10180 2620,10180 2660,10140 2660,2530 2790,2400 R18.2
ROW<0>: D1.2 D2.2 D3.2 D4.2 D5.2 D6.2 D7.2 D8.2 D9.2 D10.2 D11.2 D12.2 D13.2 D14.2 D15.2 D16.2 R1.1 | length 7450
  Top Layer w20: D1.2 D15.2 ; R1.1 1450,10050 ; 1450,9800 D16.2
ROW<1>: D17.2 D18.2 D19.2 D20.2 D21.2 D22.2 D23.2 D24.2 D25.2 D26.2 D27.2 D28.2 D29.2 D30.2 D31.2 D32.2 R2.1 | length 7250
  Top Layer w20: D17.2 D31.2 ; D18.2 D32.2 ; 1800,9300 D19.2
ROW<2>: D33.2 D34.2 D35.2 D36.2 D37.2 D38.2 D39.2 D40.2 D41.2 D42.2 D43.2 D44.2 D45.2 D46.2 D47.2 D48.2 R3.1 | length 7250
  Top Layer w20: D33.2 D47.2 ; D34.2 D48.2 ; 2300,8800 D37.2
ROW<3>: D49.2 D50.2 D51.2 D52.2 D53.2 D54.2 D55.2 D56.2 D57.2 D58.2 D59.2 D60.2 D61.2 D62.2 D63.2 D64.2 R4.1 | length 7250
  Top Layer w20: D49.2 D63.2 ; D50.2 D64.2 ; 2800,8300 D55.2
ROW<4>: D65.2 D66.2 D67.2 D68.2 D69.2 D70.2 D71.2 D72.2 D73.2 D74.2 D75.2 D76.2 D77.2 D78.2 D79.2 D80.2 R5.1 | length 7264.1
  Top Layer w20: D65.2 D79.2 ; D66.2 D80.2 ; 3300,7800 D73.2 ; R5.1 R5.1@3310,7890
ROW<5>: D81.2 D82.2 D83.2 D84.2 D85.2 D86.2 D87.2 D88.2 D89.2 D90.2 D91.2 D92.2 D93.2 D94.2 D95.2 D96.2 R6.1 | length 7250
  Top Layer w20: D81.2 D95.2 ; D82.2 D96.2 ; 3800,7300 D91.2
ROW<6>: D97.2 D98.2 D99.2 D100.2 D101.2 D102.2 D103.2 D104.2 D105.2 D106.2 D107.2 D108.2 D109.2 D110.2 D111.2 D112.2 R7.1 | length 7250
  Top Layer w20: D97.2 D111.2 ; D98.2 D112.2 ; 4300,6800 D109.2
ROW<7>: D113.2 D114.2 D115.2 D116.2 D117.2 D118.2 D119.2 D120.2 D121.2 D122.2 D123.2 D124.2 D125.2 D126.2 D127.2 D128.2 R8.1 | length 7250
  Top Layer w20: D113.2 D127.2 4800,6300 ; D114.2 D128.2
ROW<8>: D129.2 D130.2 D131.2 D132.2 D133.2 D134.2 D135.2 D136.2 D137.2 D138.2 D139.2 D140.2 D141.2 D142.2 D143.2 D144.2 R9.1 | length 7250
  Top Layer w20: D129.2 D143.2 ; D130.2 D144.2 ; 1800,5800 D131.2
ROW<9>: D145.2 D146.2 D147.2 D148.2 D149.2 D150.2 D151.2 D152.2 D153.2 D154.2 D155.2 D156.2 D157.2 D158.2 D159.2 D160.2 R10.1 | length 7250
  Top Layer w20: D145.2 D159.2 ; D146.2 D160.2 ; 2300,5300 D149.2
ROW<10>: D161.2 D162.2 D163.2 D164.2 D165.2 D166.2 D167.2 D168.2 D169.2 D170.2 D171.2 D172.2 D173.2 D174.2 D175.2 D176.2 R11.1 | length 7250
  Top Layer w20: D161.2 D175.2 ; D162.2 D176.2 ; 2800,4800 D167.2
ROW<11>: D177.2 D178.2 D179.2 D180.2 D181.2 D182.2 D183.2 D184.2 D185.2 D186.2 D187.2 D188.2 D189.2 D190.2 D191.2 D192.2 R12.1 | length 7250
  Top Layer w20: D177.2 D191.2 ; D178.2 D192.2 ; 3300,4300 D185.2
ROW<12>: D193.2 D194.2 D195.2 D196.2 D197.2 D198.2 D199.2 D200.2 D201.2 D202.2 D203.2 D204.2 D205.2 D206.2 D207.2 D208.2 R13.1 | length 7250
  Top Layer w20: D193.2 D207.2 ; D194.2 D208.2 ; 3800,3800 D203.2
ROW<13>: D209.2 D210.2 D211.2 D212.2 D213.2 D214.2 D215.2 D216.2 D217.2 D218.2 D219.2 D220.2 D221.2 D222.2 D223.2 D224.2 R14.1 | length 7250
  Top Layer w20: D209.2 D223.2 ; D210.2 D224.2 ; 4300,3300 D221.2
ROW<14>: D225.2 D226.2 D227.2 D228.2 D229.2 D230.2 D231.2 D232.2 D233.2 D234.2 D235.2 D236.2 D237.2 D238.2 D239.2 D240.2 R15.1 | length 7250
  Top Layer w20: D225.2 D239.2 4800,2800 ; D226.2 D240.2
ROW<15>: D241.2 D242.2 D243.2 D244.2 D245.2 D246.2 D247.2 D248.2 D249.2 D250.2 D251.2 D252.2 D253.2 D254.2 D255.2 D256.2 R16.1 | length 7264.1
  Top Layer w20: D241.2 D255.2 ; D242.2 D256.2 ; R16.1@1790,2410 R16.1 ; 1800,2300 D243.2
ROW<16>: D257.2 D258.2 D259.2 D260.2 D261.2 D262.2 D263.2 D264.2 D265.2 D266.2 D267.2 D268.2 D269.2 D270.2 D271.2 D272.2 R17.1 | length 7250
  Top Layer w20: D257.2 D271.2 ; D258.2 D272.2 ; 2300,1800 D261.2
ROW<17>: D273.2 D274.2 D275.2 D276.2 D277.2 D278.2 D279.2 D280.2 D281.2 D282.2 D283.2 D284.2 D285.2 D286.2 D287.2 D288.2 R18.1 | length 7250
  Top Layer w20: D273.2 D287.2 ; D274.2 D288.2 ; 2800,1300 D279.2
pads on no net: Q19.4 Q20.4 Q21.4 Q22.4 Q23.4 Q24.4 Q25.4 Q26.4 Q27.4 Q28.4 Q29.4 Q30.4 Q31.4 Q32.4 Q33.4 Q34.4

## Keep-outs
Mechanical 1:
  the board outline again, w10

## Silkscreen, mask and mechanical layers (free items; w line width, h text height)
Top Overlay:
  lines w10: 1200,2200 1200,1200 2200,1200 ; 1200,2200 2200,2200 ; 1200,2200 1200,3200 ; 1200,2200 2200,2200 ; 1200,3200 1200,4200 ; 1200,3200 2200,3200 ; 1200,3200 2200,3200 ; 1200,4200 1200,5200 ; 1200,4200 2200,4200 ; 1200,4200 2200,4200 ; 1200,5200 2200,5200 ; 1200,5200 1200,6200 ; 1200,5200 2200,5200 ; 1200,6200 1200,7200 ; 1200,6200 2200,6200 ; 1200,6200 2200,6200 ; 1200,7200 1200,8200 ; 1200,7200 2200,7200 ; 1200,7200 2200,7200 ; 1200,8200 2200,8200 ; 1200,8200 1200,9200 ; 1200,8200 2200,8200 ; 1200,9200 1200,10200 2200,10200 ; 1200,9200 2200,9200 ; 1200,9200 2200,9200 ; 2200,1200 2200,2200 ; 2200,1200 3200,1200 ; 2200,1200 2200,2200 ; 2200,2200 3200,2200 ; 2200,2200 2200,3200 ; 2200,2200 3200,2200 ; 2200,2200 2200,3200 ; 2200,3200 2200,4200 ; 2200,3200 3200,3200 ; 2200,3200 2200,4200 ; 2200,3200 3200,3200 ; 2200,4200 2200,5200 ; 2200,4200 3200,4200 ; 2200,4200 2200,5200 ; 2200,4200 3200,4200 ; 2200,5200 3200,5200 ; 2200,5200 2200,6200 ; 2200,5200 3200,5200 ; 2200,5200 2200,6200 ; 2200,6200 2200,7200 ; 2200,6200 3200,6200 ; 2200,6200 2200,7200 ; 2200,6200 3200,6200 ; 2200,7200 2200,8200 ; 2200,7200 3200,7200 ; 2200,7200 2200,8200 ; 2200,7200 3200,7200 ; 2200,8200 3200,8200 ; 2200,8200 2200,9200 ; 2200,8200 3200,8200 ; 2200,8200 2200,9200 ; 2200,9200 2200,10200 ; 2200,9200 3200,9200 ; 2200,9200 2200,10200 ; 2200,9200 3200,9200 ; 2200,10200 3200,10200 ; 3200,1200 3200,2200 ; 3200,1200 4200,1200 ; 3200,1200 3200,2200 ; 3200,2200 4200,2200 ; 3200,2200 3200,3200 ; 3200,2200 4200,2200 ; 3200,2200 3200,3200 ; 3200,3200 3200,4200 ; 3200,3200 4200,3200 ; 3200,3200 3200,4200 ; 3200,3200 4200,3200 ; 3200,4200 3200,5200 ; 3200,4200 4200,4200 ; 3200,4200 3200,5200 ; 3200,4200 4200,4200 ; 3200,5200 4200,5200 ; 3200,5200 3200,6200 ; 3200,5200 4200,5200 ; 3200,5200 3200,6200 ; 3200,6200 3200,7200 ; 3200,6200 4200,6200 ; 3200,6200 3200,7200 ; 3200,6200 4200,6200 ; 3200,7200 3200,8200 ; 3200,7200 4200,7200 ; 3200,7200 3200,8200 ; 3200,7200 4200,7200 ; 3200,8200 4200,8200 ; 3200,8200 3200,9200 ; 3200,8200 4200,8200 ; 3200,8200 3200,9200 ; 3200,9200 3200,10200 ; 3200,9200 4200,9200 ; 3200,9200 3200,10200 ; 3200,9200 4200,9200 ; 3200,10200 4200,10200 ; 4200,1200 4200,2200 ; 4200,1200 5200,1200 5200,2200 ; 4200,1200 4200,2200 ; 4200,2200 5200,2200 ; 4200,2200 4200,3200 ; 4200,2200 5200,2200 ; 4200,2200 4200,3200 ; 4200,3200 4200,4200 ; 4200,3200 5200,3200 ; 4200,3200 4200,4200 ; 4200,3200 5200,3200 ; 4200,4200 4200,5200 ; 4200,4200 5200,4200 ; 4200,4200 4200,5200 ; 4200,4200 5200,4200 ; 4200,5200 5200,5200 ; 4200,5200 4200,6200 ; 4200,5200 5200,5200 ; 4200,5200 4200,6200 ; 4200,6200 4200,7200 ; 4200,6200 5200,6200 ; 4200,6200 4200,7200 ; 4200,6200 5200,6200 ; 4200,7200 4200,8200 ; 4200,7200 5200,7200 ; 4200,7200 4200,8200 ; 4200,7200 5200,7200 ; 4200,8200 5200,8200 ; 4200,8200 4200,9200 ; 4200,8200 5200,8200 ; 4200,8200 4200,9200 ; 4200,9200 4200,10200 ; 4200,9200 5200,9200 ; 4200,9200 4200,10200 ; 4200,9200 5200,9200 ; 4200,10200 5200,10200 5200,9200 ; 5200,2200 5200,3200 ; 5200,3200 5200,4200 ; 5200,4200 5200,5200 ; 5200,5200 5200,6200 ; 5200,6200 5200,7200 ; 5200,7200 5200,8200 ; 5200,8200 5200,9200